# Altium PCB CYCLONE.PcbDoc
Units mil, origin at the board's own origin, x right, y up, seen from the top; angles counter-clockwise.
Board outline 1900 x 1350 mil, 4 copper layers (Top Layer, Mid Layer 1, Mid Layer 2, Bottom Layer), stack 61.811 mil thick; 32 components, 20 nets, 111 pads, 65 vias.
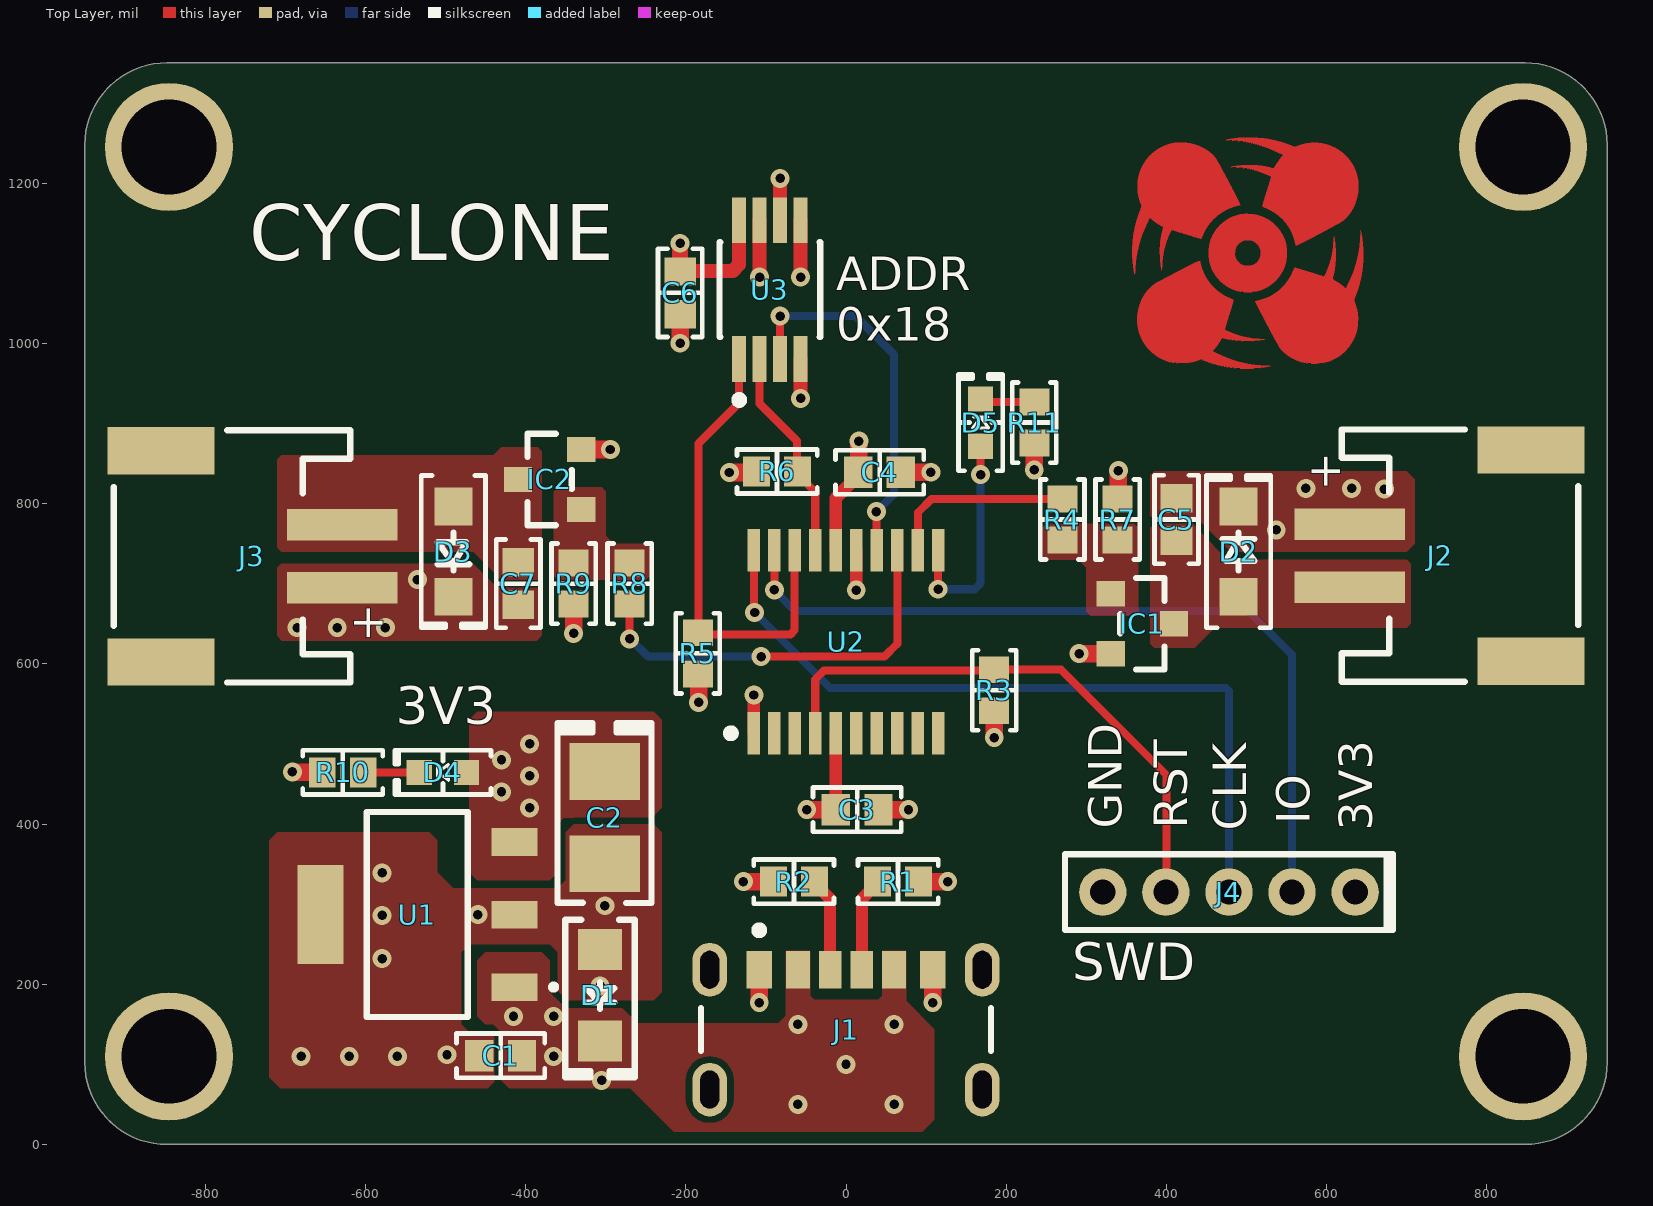
[diagram p0: Top Layer view]
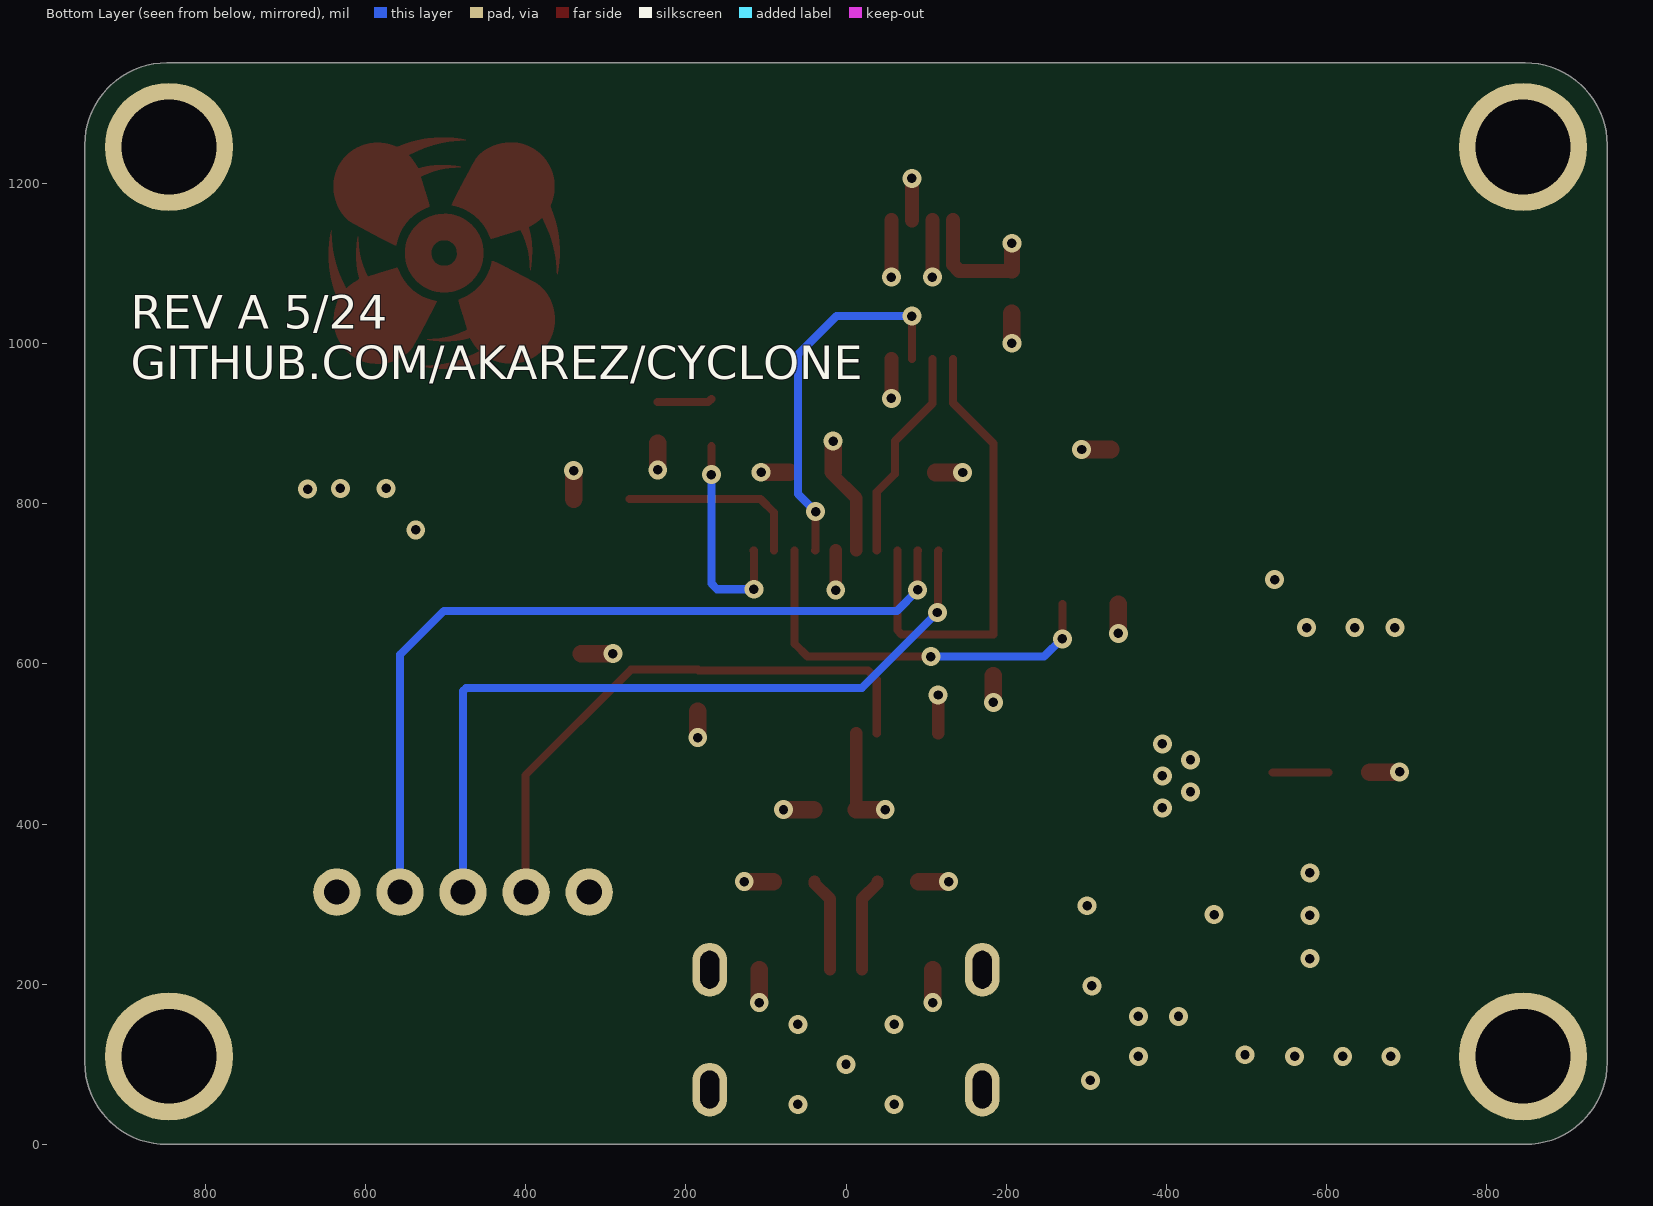
[diagram p1: Bottom Layer view, seen from below]
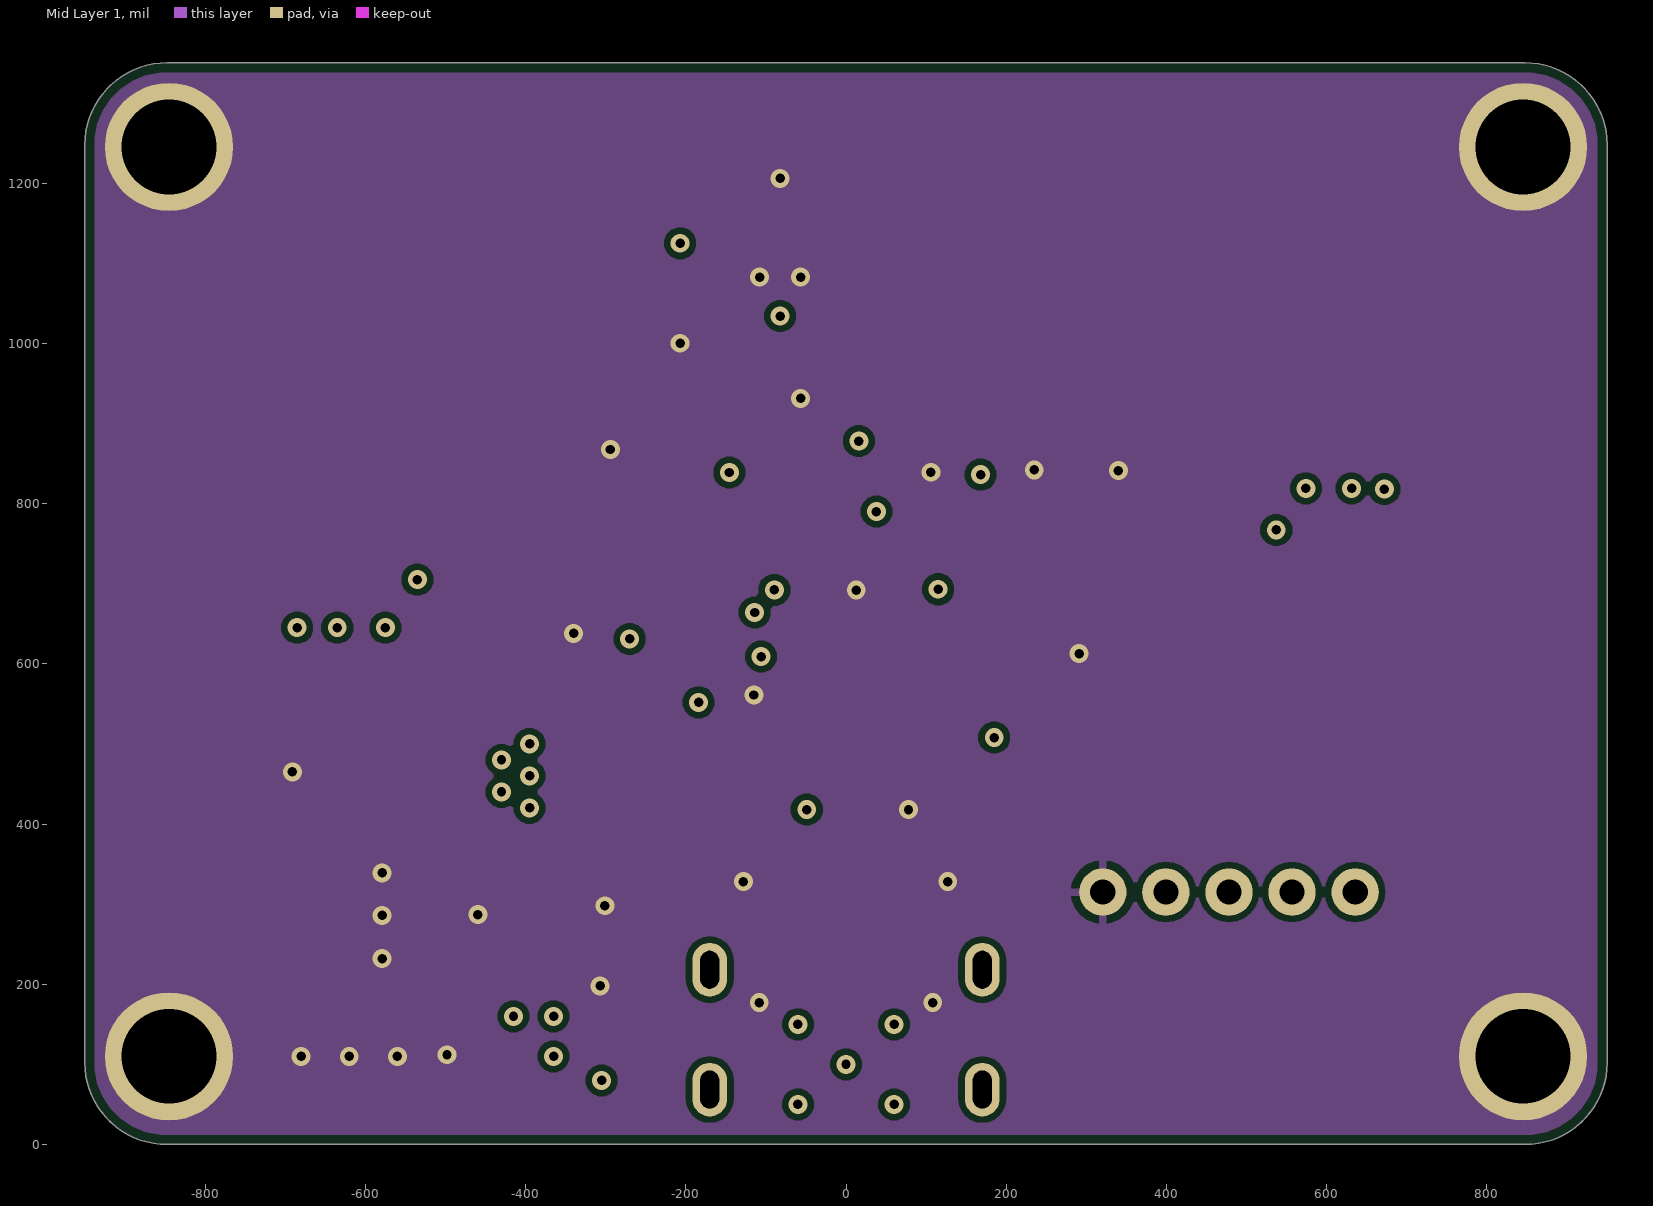
[diagram p2: Mid Layer 1]
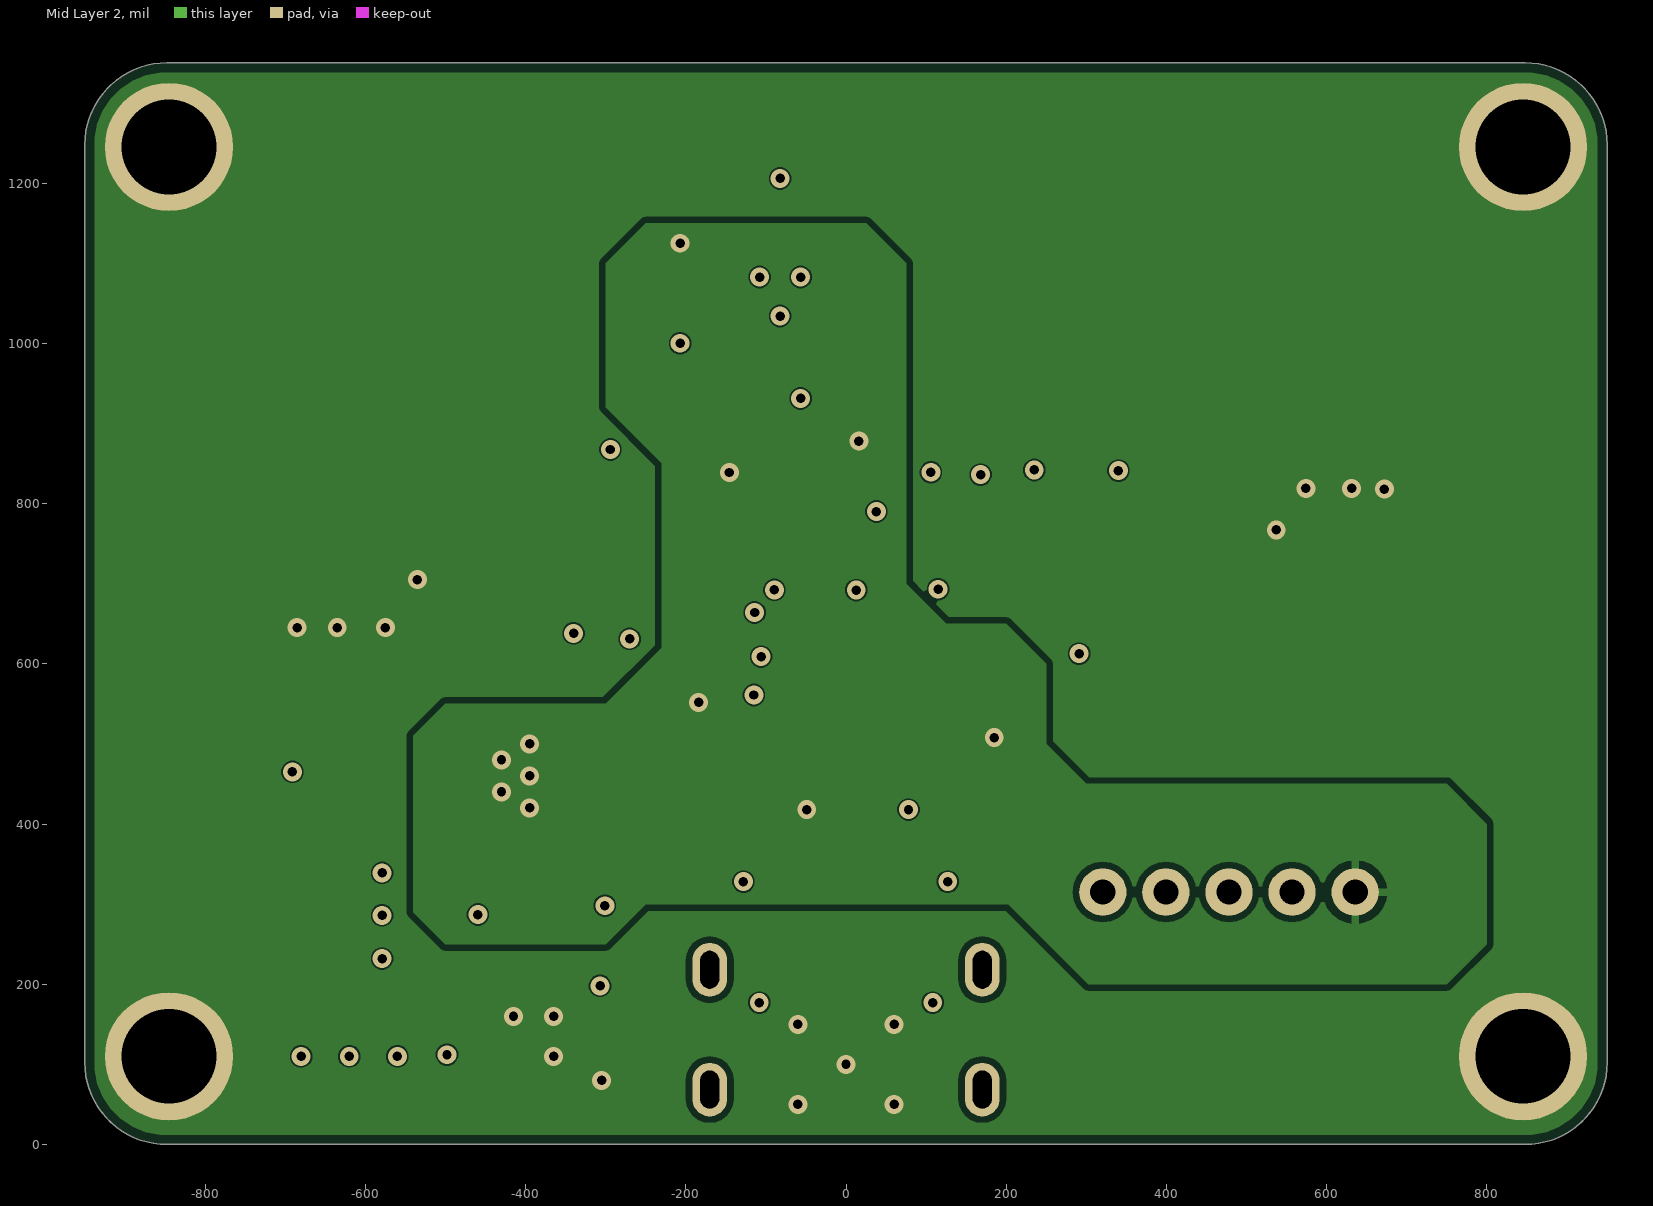
[diagram p3: Mid Layer 2]
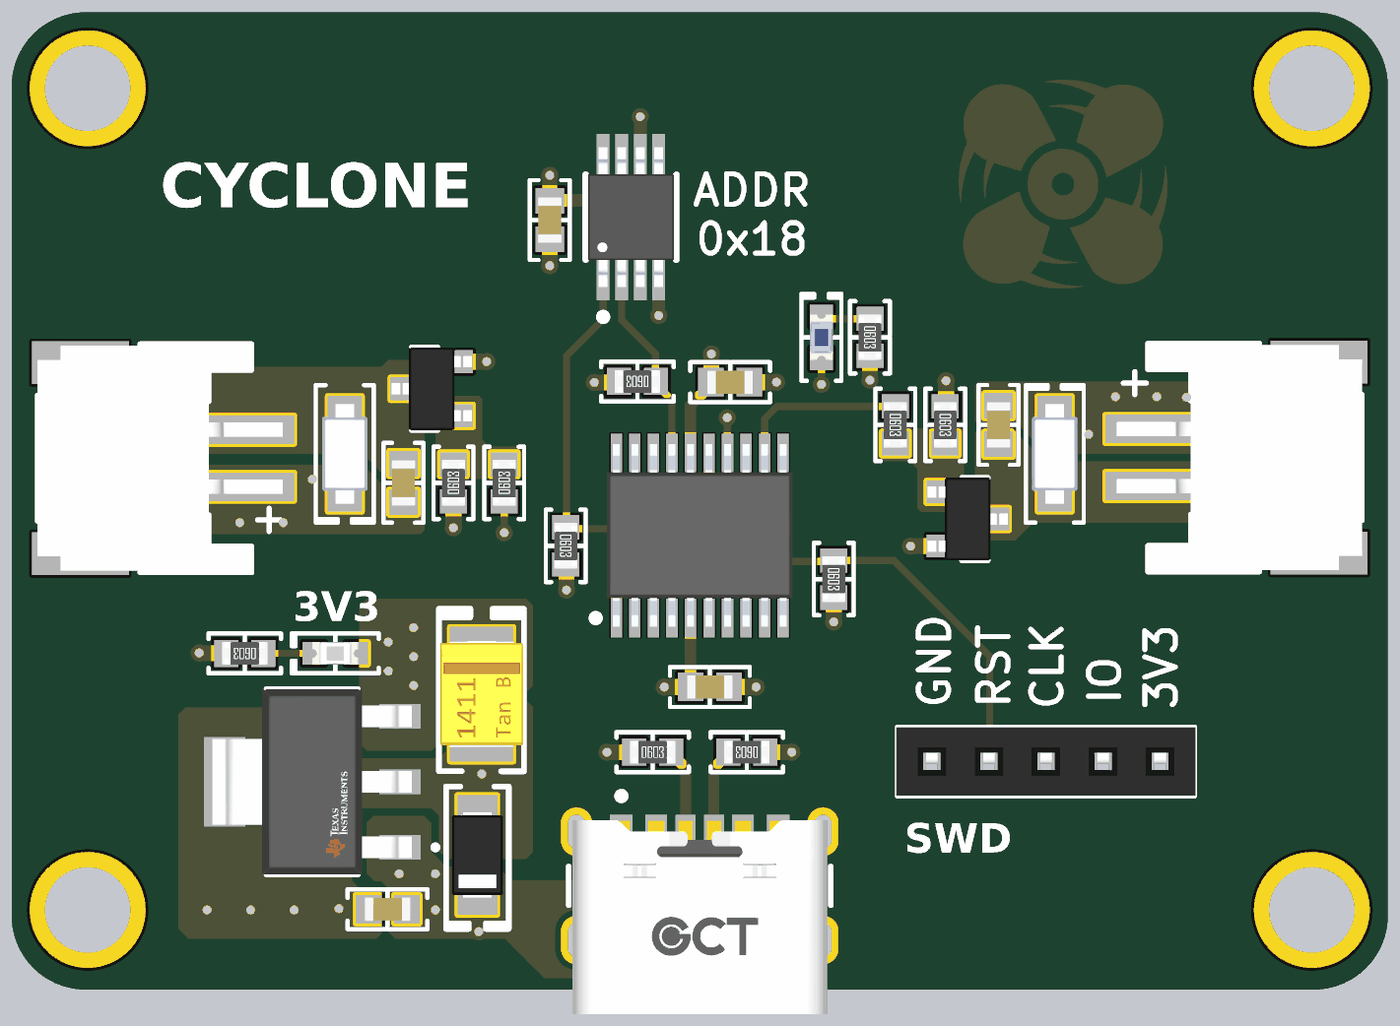
[diagram p4: 3D render of the assembled board from above, using the file's embedded part models]

## Layer stack, top to bottom
Top Solder: solder mask 0.5, Solder Resist, Dk 3.8
Top Layer: signal copper 1.378
Dielectric 1: prepreg 3.937, 2313, Dk 4.05
Mid Layer 1: signal copper 0.689
Core: core 49.8031, FR-4, Dk 4.5
Mid Layer 2: signal copper 0.689
Dielectric 2: prepreg 3.937, 2313, Dk 4.05
Bottom Layer: signal copper 1.378
Bottom Solder: solder mask 0.5, Solder Resist, Dk 3.8

## Board outline
-950,102.43 ccw(c-847.57,102.43) -847.57,0 847.57,0 ccw(c847.57,102.43) 950,102.43 950,1247.57 ccw(c847.57,1247.57) 847.57,1350 -847.57,1350 ccw(c-847.57,1247.57) -950,1247.57

## Design rules (kind name [scope] priority, off if disabled: settings)
BoardOutlineClearance [All] p1: gap=11.81 ignorepadtopadclearanceinfootprint=FALSE except(15.75: Arc-SplitBarrior Arc-SplitContinuation Track-SplitBarrior Track-SplitContinuation SMDPad-SplitBarrior SMDPad-SplitContinuation THPad-SplitBarrior THPad-SplitContinuation Via-SplitBarrior Via-SplitContinuation Fill-SplitBarrior Fill-SplitContinuation Poly-SplitBarrior Poly-SplitContinuation Region-SplitBarrior Region-SplitContinuation Text-SplitBarrior Text-SplitContinuation)
Clearance "Clearance Different Nets" [All] p1: gap=7.87 ignorepadtopadclearanceinfootprint=FALSE except(3.5: Arc-Arc Arc-Track Arc-SMDPad Track-Track Track-SMDPad; 5: SMDPad-SMDPad SMDPad-Via THPad-Via Via-Via; 10: Arc-Text Track-Text SMDPad-Text THPad-Text Via-Text Fill-Text Poly-Text Region-Text Text-Text; 19.68: THPad-THPad Via-Hole)
Clearance "Clearance Same Nets" [All] p2: gap=7.87 ignorepadtopadclearanceinfootprint=FALSE except(3.5: Arc-Arc Arc-Track Arc-SMDPad Track-Track Track-SMDPad SMDPad-SMDPad; 5: SMDPad-Via THPad-Via; 10: Arc-Via Arc-Text Track-Via Track-Text SMDPad-Text THPad-Text Via-Via Via-Text Fill-Text Poly-Text Region-Text Text-Text)
Clearance "Clearance Bottom Layer" [OnLayer('Bottom Layer')] p3: gap=8 ignorepadtopadclearanceinfootprint=TRUE except(10: Arc-Text Track-Text SMDPad-Text THPad-Text Via-Text Fill-Text Poly-Text Region-Text Text-Text)
Clearance "Clearance Top Layer" [OnLayer('Top Layer')] p4: gap=8 ignorepadtopadclearanceinfootprint=TRUE except(10: Arc-Text Track-Text SMDPad-Text THPad-Text Via-Text Fill-Text Poly-Text Region-Text Text-Text)
HoleSize [All] p1: absolutevalues=TRUE maxlimit=248.03 minlimit=7.87 maxpercent=80.000 minpercent=20.000
MinimumAnnularRing [All] p1: minimumring=5.12
MinimumSolderMaskSliver [All] p1: minsoldermaskwidth=3.94
PolygonConnect [All] p1: thpad.connectstyle=Relief thpad.reliefconductorwidth=10 thpad.reliefentries=4 thpad.polygonreliefangle="90 Angle" thpad.airgapwidth=10 smdpad.connectstyle=Direct smdpad.reliefconductorwidth=10 smdpad.reliefentries=4 smdpad.polygonreliefangle="90 Angle" smdpad.airgapwidth=10 via.connectstyle=Direct via.reliefconductorwidth=10 via.reliefentries=4 via.polygonreliefangle="90 Angle" via.airgapwidth=10
PolygonConnect PolygonConnect_1 [InNet('GND')] p2: thpad.connectstyle=Relief thpad.reliefconductorwidth=20 thpad.reliefentries=4 thpad.polygonreliefangle="90 Angle" thpad.airgapwidth=10 smdpad.connectstyle=Relief smdpad.reliefconductorwidth=20 smdpad.reliefentries=4 smdpad.polygonreliefangle="90 Angle" smdpad.airgapwidth=10 via.connectstyle=Direct via.reliefconductorwidth=20 via.reliefentries=4 via.polygonreliefangle="90 Angle" via.airgapwidth=10
RoutingCorners [All] p1: cornerstyle=Round minsetback=100 maxsetback=100
RoutingVias [All] p1: holewidth=19.68 width=39.37 viastyle="Through Hole" minholewidth=7.87 minwidth=13.78 maxholewidth=39.37 maxwidth=78.74
SilkToSilkClearance [All] p1: silktosilkclearance=3.94
SilkToSolderMaskClearance [IsPad] p1: minsilkscreentomaskgap=3.94 clearancetoexposedcopper=TRUE
SolderMaskExpansion [All] p1: expansion=4 istentingtop=FALSE
Width [All] p1: maxlimit=100 minlimit=3.5 preferedwidth=15
25 further rules are at their usual default settings.

## Classes and differential pairs
component class MCU: C3 C4 D5 R3 R11 U2
component class PERIPHERALS: C5 C6 C7 D2 D3 IC1 IC2 J2 J3 J4 R4 R5 R6 R7 R8 R9 U3
component class USB: C1 C2 D1 D4 J1 R1 R2 R10 U1

## Components (designator, comment, footprint, x,y, rotation, side; value= is the part's Value field where it differs from the comment)
C1 "1 µ" "CAP 0603_1608" -431,111 r0 top
C2 "33 µF" "CAP POL 1411_3528" -301,408 r270 top
C3 "0.1 µ" "CAP 0603_1608" 14,418 r180 top
C4 "0.1 µ" "CAP 0603_1608" 42,839 r180 top
C5 "1 µ" "CAP 0603_1608" 412.5,780 r90 top
C6 "0.1 µ" "CAP 0603_1608" -207,1063 r90 top
C7 "1 µ" "CAP 0603_1608" -409,700 r270 top
D1 "VTVS5V0ASMF-M3-08" "SMF DO-219AB" -307,186 r270 top
D2 "US1DWF-7" SOD123F 490,740 r90 top
D3 "US1DWF-7" SOD123F -490,740 r270 top
D4 "Green" "LED 0603_1608 GREEN" -503.11,464.43 r180 top
D5 "Blue" "LED 0603_1608 BLUE" 168,901 r90 top
IC1 "DMN62D0U-13" "DIODES SOT-23-3" 370,650 r0 top
IC2 "DMN62D0U-13" "DIODES SOT-23-3" -370,830 r180 top
J1 "USB4125-GF-A-0190" FP-USB4125-GF-A-0190-MFG 0,100 r0 top
J2 "S2B-PH-SM4-TB(LF)(SN)" "JST S2B-PH-SM4-TB" 796,735 r270 top
J3 "S2B-PH-SM4-TB(LF)(SN)" "JST S2B-PH-SM4-TB" -796,734 r90 top
J4 "NPPN051BFCN-RC" "SULLINS NPPN051BFCN" 478,315 r180 top
R1 "5.1 k" "RES 0603_1608" 65,328 r180 top
R2 "5.1 k" "RES 0603_1608" -65,328 r0 top
R3 "10 k" "RES 0603_1608" 185,567 r270 top
R4 "220" "RES 0603_1608" 270,780 r270 top
R5 "10 k" "RES 0603_1608" -185,613 r270 top
R6 "10 k" "RES 0603_1608" -86,840 r180 top
R7 "10 k" "RES 0603_1608" 339,780 r270 top
R8 "220" "RES 0603_1608" -270,700 r90 top
R9 "10 k" "RES 0603_1608" -340,700 r90 top
R10 "1 k" "RES 0603_1608" -628.11,464.43 r180 top
R11 "1 k" "RES 0603_1608" 235,901 r270 top
U1 "LM3940" FP-DCY0004A-IPC_C -535,287 r180 top
U2 "STM32F030F4P6TR" STM-TSSOP20_M 0,627.37 r90 top
U3 "MCP9808T-E/MS" FP-C04-111-MFG -95,1067 r90 top

## Footprints (in the part's own frame and the unit in brackets; to place one, negate y for a bottom-side part, rotate by r counter-clockwise, add the part's x,y. Pads: shape width x height; smd on the part's side, far side on the other; paste and mask are expansions set on the pad)
"CAP 0603_1608" [mm] "Chip Capacitor, 2-Leads, Body 1.60x0.80mm, IPC Medium Density"
  rect 0.9x1 smd: 1(-0.675,0) 2(0.675,0)
  silkscreen extent -1.4,-0.7 1.4,0.7, body extent -0.8,-0.41 0.8,0.41, height 0.82
"CAP POL 1411_3528" [mm] "Molded Capacitor, 2-Leads, Body 3.50x2.80mm, IPC Medium Density"
  rect 1.8x2.23 smd: 1(-1.46,0) 2(1.46,0)
  silkscreen extent -3,-1.5 2.71,1.48, body extent -1.87,-1.45 1.86,1.45, height 2
"DIODES SOT-23-3" [mm] "SOT23, 3-Leads, Body 2.90x2.40mm, Pitch 0.95mm, IPC Medium Density"
  rect 0.9x0.8 smd: 1(-1,0.95) 2(-1,-0.95) 3(1,0)
  silkscreen extent -0.7,-1.45 0.7,1.45, body extent -1.41,-1.45 1.41,1.45, height 1.5
FP-C04-111-MFG [mm]
  rect 1.45x0.45 smd paste+0 mask+0: 1(-2.2,0.975) 2(-2.2,0.325) 3(-2.2,-0.325) 4(-2.2,-0.975) 5(2.2,-0.975) 6(2.2,-0.325) 7(2.2,0.325) 8(2.2,0.975)
  silkscreen extent -3.62,-1.6 1.5,1.6, body extent -2.45,-1.5 2.45,1.5, height 1.1
FP-DCY0004A-IPC_C [mm]
  rect 1.454x0.873 smd paste+0 mask+0: 1(-3.075,2.3) 2(-3.075,0) 3(-3.075,-2.3)
  rect 1.454x3.132 smd paste+0 mask+0: 4(3.075,0)
  silkscreen extent -4.37,-3.25 1.6,3.25, body extent -3.9,-3.35 3.9,3.35, height 0.25
FP-USB4125-GF-A-0190-MFG [mm]
  rrect100% 1.1x1.7 hole 1.2 slot 0.6 at 0 deg paste-2539.97 mask+0: 1(-4.32,3) 2(4.32,3) 3(-4.32,-0.8) 4(4.32,-0.8)
  rect 0.7x1.2 smd paste+0 mask+0: A5(-0.5,3) B5(0.5,3)
  rect 0.76x1.2 smd paste+0 mask+0: A9(1.52,3) B9(-1.52,3)
  rect 0.8x1.2 smd paste+0 mask+0: A12(2.75,3) B12(-2.75,3)
  silkscreen extent -4.59,0.43 4.59,4.37, body extent -4.97,-3.57 4.97,3.95, height 0.25
"JST S2B-PH-SM4-TB" [mm] "JST PH Series 2mm pitch, side entry connector"
  rect 1x3.5 smd: 1(-1,-4.25) 2(1,-4.25)
  rect 1.5x3.4 smd: M(-3.35,1.5) M(3.35,1.5)
  silkscreen extent -4,-4.5 4,3, body extent -3.95,-5.6 3.95,3.01, height 5.6
"LED 0603_1608 BLUE" [mm] "Chip Diode, 2-Leads, Body 1.60x0.80mm, IPC Medium Density"
  rect 0.8x0.8 smd: 1(-0.75,0) 2(0.75,0)
  silkscreen extent -1.52,-0.7 1.52,0.7, body extent -0.8,-0.4 0.8,0.4, height 0.53
"LED 0603_1608 GREEN" [mm] "Chip Diode, 2-Leads, Body 1.60x0.80mm, IPC Medium Density"
  rect 0.8x0.8 smd: 1(-0.75,0) 2(0.75,0)
  silkscreen extent -1.52,-0.7 1.52,0.7, body extent -0.8,-0.4 0.8,0.4, height 0.53
"RES 0603_1608" [mm] "Chip Resistor, 2-Leads, Body 1.60x0.80mm, IPC Medium Density"
  rect 0.85x0.95 smd: 1(-0.65,0) 2(0.65,0)
  silkscreen extent -1.27,-0.7 1.27,0.7, body extent -0.8,-0.4 0.8,0.4, height 0.45
"SMF DO-219AB" [mm] "Molded Diode, 2-Leads, Body 3.90x1.90mm, IPC Medium Density"
  rect 1.3x1.4 smd: 1(-1.45,0) 2(1.45,0)
  silkscreen extent -2.4,-1.1 2.59,1.1, body extent -1.5,-0.9 1.5,0.9, height 1.18
SOD123F [mm] "SODFL, 2-Leads, Body 1.60x3.50mm, IPC Medium Density"
  rect 1.2x1.2 smd: 1(-1.43,0) 2(1.43,0)
  silkscreen extent -2.41,-1.02 2.41,1.02, body extent -1.75,-0.8 1.75,0.8, height 1.1
STM-TSSOP20_M [mm] "SOP, 20-Leads, Body 6.6x4.5mm, Pitch 0.65mm, IPC Low Density"
  rect 1.35x0.4 smd mask+0.051: 1(-2.9,2.925) 2(-2.9,2.275) 3(-2.9,1.625) 4(-2.9,0.975) 5(-2.9,0.325) 6(-2.9,-0.325) 7(-2.9,-0.975) 8(-2.9,-1.625) 9(-2.9,-2.275) 10(-2.9,-2.925) 11(2.9,-2.925) 12(2.9,-2.275) 13(2.9,-1.625) 14(2.9,-0.975) 15(2.9,-0.325) 16(2.9,0.325) 17(2.9,0.975) 18(2.9,1.625) 19(2.9,2.275) 20(2.9,2.925)
  silkscreen extent -3.02,3.52 -2.78,3.77, body extent -3.2,-3.25 3.2,3.25, height 1.2
"SULLINS NPPN051BFCN" [mm]
  round 1.5 hole 0.8: 1(-4,0) 2(-2,0) 3(0,0) 4(2,0) 5(4,0)
  silkscreen extent -5.2,-1.2 5.2,1.2, body extent -5.25,-1.2 5.25,1.2, height 4.41

## Part data
C1 C5 C7: library part C0603C105K4RACAUTO, "CAP CER 1UF 16V X7R 0603", Capacitance="1 µF", Device Package="0603 (1608 Metric)", Manufacturer=KEMET, Operating Temperature="-55°C ~ 125°C", Ratings=AEC-Q200, Supplier Part Number 1=399-17704-1-ND, Temperature Coefficient=X7R, Tolerance=±10%, Voltage - Rated=16V, Applications="Automotive, Bypass, Decoupling", ComponentLink1Description=Datasheet, ComponentLink1URL=https://api.kemet.com/component-edge/download/datasheet/C0603C105K4RACAUTO.pdf, ComponentLink2Description="DigiKey Link", ComponentLink2URL=https://www.digikey.com/en/products/detail/kemet/C0603C105K4RACAUTO/8635831, lastupdated="2/9/2024 8:10:30 PM", Lifecycle Status=Active, Minimum Order=1, Mounting Type="Surface Mount, MLCC", Package / Case="0603 (1608 Metric)", Packaging=TapeAndReel, Part Number=C0603C105K4RACAUTO, Part Status=Active, partid=2179, Price=0.01, Series="SMD Auto X7R", Size / Dimension="0.063\" L x 0.031\" W (1.60mm x 0.80mm)", Supplier 1=DigiKey, Thickness (Max)="0.037\" (0.95mm)"
C2: library part T495B336M016ATE350, "CAP TANT 33UF 20% 16V 1411", Device Package="1411 (3528 Metric)", ESR (Equivalent Series Resistance)="350mOhm @ 100kHz", Lifetime @ Temp.="2000 Hrs @ 125°C", Manufacturer=KEMET, Manufacturer Size Code=B, Operating Temperature="-55°C ~ 125°C", Supplier Part Number 1=399-18820-1-ND, Tolerance=±20%, Voltage - Rated="16 V", Capacitance="33 µF", ComponentLink1Description=Datasheet, ComponentLink1URL=https://api.kemet.com/component-edge/download/datasheet/T495B336M016ATE350.pdf, ComponentLink2Description="DigiKey Link", ComponentLink2URL=https://www.digikey.com/en/products/detail/kemet/T495B336M016ATE350/9642234, Features="General Purpose", Height - Seated (Max)="0.083\" (2.10mm)", lastupdated="3/11/2024 7:26:10 AM", Lifecycle Status=Active, Minimum Order=1, Mounting Type="Surface Mount", Package / Case="1411 (3528 Metric)", Packaging=TapeAndReel, Part Number=T495B336M016ATE350, Part Status=Active, partid=33, Price=0.64, Series=T495, Size / Dimension="0.138\" L x 0.110\" W (3.50mm x 2.80mm)", Supplier 1=DigiKey, Type=Molded
C3 C4 C6: library part C0603C104K5RAC7411, "CAP CER 0.1UF 50V X7R 0603", Capacitance="0.1 µF", Device Package="0603 (1608 Metric)", Manufacturer=KEMET, Operating Temperature="-55°C ~ 125°C", Supplier Part Number 1=399-C0603C104K5RAC7411CT-ND, Temperature Coefficient=X7R, Tolerance=±10%, Voltage - Rated=50V, Applications="Bypass, Decoupling", ComponentLink1Description=Datasheet, ComponentLink1URL=https://api.kemet.com/component-edge/download/datasheet/C0603C104K5RAC7411.pdf, ComponentLink2Description="DigiKey Link", ComponentLink2URL=https://www.digikey.com/en/products/detail/kemet/C0603C104K5RAC7411/3317013, lastupdated="2/9/2024 8:10:30 PM", Lifecycle Status=Active, Minimum Order=1, Mounting Type="Surface Mount, MLCC", Package / Case="0603 (1608 Metric)", Packaging=TapeAndReel, Part Number=C0603C104K5RAC7411, Part Status=Active, partid=2233, Price=0.01, Series="SMD Comm X7R", Size / Dimension="0.063\" L x 0.031\" W (1.60mm x 0.80mm)", Supplier 1=DigiKey, Thickness (Max)="0.035\" (0.90mm)"
D1: "TVS DIODE 5V 8.9V DO219AB", Capacitance @ Frequency="2095pF @ 1MHz", Current - Peak Pulse (10/1000µs)=42.95A, Manufacturer="Vishay Semiconductor Diodes Division", Operating Temperature="-55°C ~ 175°C (TJ)", Package / Case=DO-219AB, Power - Peak Pulse=400W, Power Line Protection=No, Supplier Device Package="DO-219AB (SMF)", Supplier Part Number 1=VTVS5V0ASMF-M3-08GICT-ND, Voltage - Breakdown (Min)=6.4V, Voltage - Clamping (Max) @ Ipp=8.9V, Voltage - Reverse Standoff (Typ)=5V, Applications="General Purpose", ComponentLink1Description=Datasheet, ComponentLink1URL=http://www.vishay.com/docs/85891/vtvs3v3asmf.pdf, ComponentLink2Description="DigiKey Link", ComponentLink2URL=http://digikey.com/product-detail/en/vishay-semiconductor-diodes-division/VTVS5V0ASMF-M3-08/VTVS5V0ASMF-M3-08GICT-ND/7056003, lastupdated="3/11/2024 8:09:28 AM", Lifecycle Status=Active, Minimum Order=1, Mounting Type="Surface Mount", Packaging=TapeAndReel, Part Number=VTVS5V0ASMF-M3-08, Part Status=Active, partid=5492, Price=0.11, Series=TransZorb®, Supplier 1=DigiKey, Type=Zener, Unidirectional Channels=1
D2 D3: "DIODE GEN PURP 200V 1A SOD123F", Capacitance @ Vr, F="14pF @ 4V, 1MHz", Current - Average Rectified (Io)=1A, Current - Reverse Leakage @ Vr="5 µA @ 200 V", Manufacturer="Diodes Incorporated", Operating Temperature - Junction="-55°C ~ 150°C", Package / Case=SOD-123F, Supplier Part Number 1=US1DWF-7DICT-ND, Voltage - DC Reverse (Vr) (Max)="200 V", Voltage - Forward (Vf) (Max) @ If="950 mV @ 1 A", ComponentLink1Description=Datasheet, ComponentLink1URL=https://www.diodes.com/assets/Datasheets/US1DWF.pdf, ComponentLink2Description="DigiKey Link", ComponentLink2URL=https://www.digikey.com/en/products/detail/diodes-incorporated/US1DWF-7/7422876, Diode Type=Standard, lastupdated="3/11/2024 7:46:45 AM", Lifecycle Status=Active, Minimum Order=1, Mounting Type="Surface Mount", Packaging=TapeAndReel, Part Number=US1DWF-7, Part Status=Active, partid=1114, Price=0.10, Reverse Recovery Time (trr)="35 ns", Series=-, Speed="Fast Recovery =< 500ns, > 200mA (Io)", Supplier 1=DigiKey, Supplier Device Package=SOD-123F
D4: library part SML-LXFP0603SUGCTR, "LED GREEN CLEAR SMD", Current - Test=5mA, Device Package="0603 (1608 Metric)", Lens Color=Colorless, Manufacturer="Lumex Opto/Components Inc.", Millicandela Rating=13mcd, Supplier Device Package=SMD, Supplier Part Number 1=67-2222-1-ND, Voltage - Forward (Vf) (Typ)=2V, Color=Green, ComponentLink1Description=Datasheet, ComponentLink1URL=https://www.lumex.com/content/files/ProductAttachment/SML-LXFP0603SUGCTR.pdf, ComponentLink2Description="DigiKey Link", ComponentLink2URL=https://www.digikey.com/en/products/detail/lumex-opto-components-inc/SML-LXFP0603SUGCTR/4496766, Configuration=Standard, Height (Max)=0.20mm, lastupdated="3/11/2024 7:51:11 AM", Lens Size="1.60mm x 0.80mm", Lens Style="Rectangle with Flat Top", Lens Transparency=Clear, Lifecycle Status=Active, Minimum Order=1, Mounting Type="Surface Mount", Package / Case="0603 (1608 Metric)", Packaging=TapeAndReel, Part Number=SML-LXFP0603SUGCTR, Part Status=Active, partid=589, Price=0.07, Series=-, Size / Dimension="1.60mm L x 0.80mm W", Supplier 1=DigiKey, Viewing Angle=130°, Wavelength - Peak=574nm
D5: library part LTST-C190TBKT, "LED BLUE CLEAR CHIP SMD", Current - Test=20mA, Device Package="0603 (1608 Metric)", Lens Color=Colorless, Manufacturer="Lite-On Inc.", Millicandela Rating=104mcd, Supplier Device Package="Chip LED", Supplier Part Number 1=160-1646-1-ND, Voltage - Forward (Vf) (Typ)=3.3V, Color=Blue, ComponentLink1Description=Datasheet, ComponentLink1URL=http://optoelectronics.liteon.com/upload/download/DS-22-99-0224/LTST-C190TBKT.PDF, ComponentLink2Description="DigiKey Link", ComponentLink2URL=http://digikey.com/product-detail/en/lite-on-inc/LTST-C190TBKT/160-1646-1-ND/573586, Configuration=Standard, Height (Max)=0.90mm, lastupdated="3/11/2024 7:50:10 AM", Lens Size="1.10mm x 0.80mm", Lens Style="Rectangle with Flat Top", Lens Transparency=Clear, Lifecycle Status=Active, Minimum Order=1, Mounting Type="Surface Mount", Package / Case="0603 (1608 Metric)", Packaging=TapeAndReel, Part Number=LTST-C190TBKT, Part Status=Active, partid=831, Price=0.08, Series=-, Size / Dimension="1.60mm L x 0.80mm W", Supplier 1=DigiKey, Viewing Angle=130°, Wavelength - Dominant=470nm, Wavelength - Peak=468nm
IC1 IC2: "MOSFET N-CH 60V 380MA SOT23", Current - Continuous Drain (Id) @ 25°C="380mA (Ta)", Drain to Source Voltage (Vdss)="60 V", Drive Voltage (Max Rds On,  Min Rds On)="1.8V, 4.5V", Input Capacitance (Ciss) (Max) @ Vds="32 pF @ 30 V", Manufacturer="Diodes Incorporated", Operating Temperature="-55°C ~ 150°C (TJ)", Package / Case="TO-236-3, SC-59, SOT-23-3", Power Dissipation (Max)="380mW (Ta)", Supplier Device Package=SOT-23-3, Supplier Part Number 1=DMN62D0U-13DICT-ND, ComponentLink1Description=Datasheet, ComponentLink1URL=https://www.diodes.com/assets/Datasheets/DMN62D0U.pdf, ComponentLink2Description="DigiKey Link", ComponentLink2URL=https://www.digikey.com/en/products/detail/diodes-incorporated/DMN62D0U-13/5453123, FET Type=N-Channel, Gate Charge (Qg) (Max) @ Vgs="0.5 nC @ 4.5 V", lastupdated="3/11/2024 8:04:06 AM", Lifecycle Status=Active, Minimum Order=1, Mounting Type="Surface Mount", Packaging=TapeAndReel, Part Number=DMN62D0U-13, Part Status=Active, Price=0.03, Rds On (Max) @ Id, Vgs="2Ohm @ 100mA, 4.5V", Series=-, Supplier 1=DigiKey, Technology="MOSFET (Metal Oxide)", Vgs (Max)=±20V, Vgs(th) (Max) @ Id="1V @ 250µA"
J1: library part CMP-002-00081-2, "USB-C (USB TYPE-C) Receptacle Connector 24 (6+18 Dummy) Position Surface Mount, Right Angle; Through Hole", Manufacturer Part #=USB4125-GF-A, Max Current Rating=3A, Max Operating Temperature=85°C, Min Operating Temperature=-30°C, Voltage Rating=20V, Connector Type="USB-C (USB TYPE-C)", Gender=Receptacle, Mounting Technology="Surface Mount, Right Angle; Through Hole", Pins="24 (6+18 Dummy)"
J2 J3: "CONN HEADER SMD R/A 2POS 2MM", Current Rating (Amps)=2A, Insulation Color=Natural, Manufacturer="JST Sales America Inc.", Material Flammability Rating="UL94 V-0", Operating Temperature="-25°C ~ 85°C", Supplier Part Number 1=455-1749-1-ND, Voltage Rating=100V, ComponentLink1Description=Datasheet, ComponentLink1URL=http://www.jst-mfg.com/product/pdf/eng/ePH.pdf, ComponentLink2Description="DigiKey Link", ComponentLink2URL=http://digikey.com/product-detail/en/jst-sales-america-inc/S2B-PH-SM4-TB-LF-SN/455-1749-1-ND/926846, Connector Type=Header, Contact Finish - Mating=Tin, Contact Finish - Post=Tin, Contact Length - Mating="0.130\" (3.30mm)", Contact Material="Copper Alloy", Contact Shape=Square, Contact Type="Male Pin", Fastening Type="Detent Lock", Features="Solder Retention", Insulation Height="0.217\" (5.51mm)", Insulation Material="Polyamide (PA6T), Nylon 6T", lastupdated="1/15/2020 3:45:11 AM", Lifecycle Status=Active, Minimum Order=1, Mounting Type="Surface Mount, Right Angle", Number of Positions=2, Number of Positions Loaded=All, Number of Rows=1, Packaging=TapeAndReel, Part Number=S2B-PH-SM4-TB(LF)(SN), Part Status=Active, partid=115, Pitch - Mating="0.079\" (2.00mm)", Price=0.27, Series=PH, Shrouding="Shrouded - 4 Wall", Style="Board to Cable/Wire", Supplier 1=DigiKey, Termination=Solder
J4: "CONN HDR 5POS 0.079 GOLD PCB", Current Rating (Amps)=2A, Insulation Color=Black, Manufacturer="Sullins Connector Solutions", Material Flammability Rating="UL94 V-0", Operating Temperature="-40°C ~ 105°C", Supplier Part Number 1=S5751-05-ND, ComponentLink1Description=Datasheet, ComponentLink1URL=https://drawings-pdf.s3.amazonaws.com/10483.pdf, ComponentLink2Description="DigiKey Link", ComponentLink2URL=https://www.digikey.com/en/products/detail/sullins-connector-solutions/NPPN051BFCN-RC/804807, Connector Type=Header, Contact Finish - Mating=Gold, Contact Finish - Post=Gold, Contact Finish Thickness - Mating=Flash, Contact Length - Post="0.094\" (2.40mm)", Contact Type="Female Socket", Fastening Type=Push-Pull, Insulation Height="0.173\" (4.40mm)", lastupdated="6/21/2022 2:43:08 PM", Lifecycle Status=Active, Minimum Order=1, Mounting Type="Through Hole", Number of Positions=5, Number of Positions Loaded=All, Number of Rows=1, Packaging=Tube, Part Number=NPPN051BFCN-RC, Part Status=Active, Pitch - Mating="0.079\" (2.00mm)", Price=0.35, Series=-, Style="Board to Board", Supplier 1=DigiKey, Termination=Solder
R1 R2: library part RMCF0603JG5K10, "RES 5.1K OHM 5% 1/10W 0603", Device Package="0603 (1608 Metric)", Manufacturer="Stackpole Electronics Inc", Operating Temperature="-55°C ~ 155°C", Power (Watts)="0.1W, 1/10W", Ratings=AEC-Q200, Resistance="5.1 kOhms", Supplier Device Package=0603, Supplier Part Number 1=738-RMCF0603JG5K10CT-ND, Temperature Coefficient=±200ppm/°C, Tolerance=±5%, ComponentLink1Description=Datasheet, ComponentLink1URL=https://www.seielect.com/catalog/sei-packaging.pdf, ComponentLink2Description="DigiKey Link", ComponentLink2URL=https://www.digikey.com/en/products/detail/stackpole-electronics-inc/RMCF0603JG5K10/1712287, Composition="Thick Film", Features="Automotive AEC-Q200", Height - Seated (Max)="0.022\" (0.55mm)", lastupdated="2/9/2024 8:43:35 PM", Lifecycle Status=Active, Minimum Order=1, Number of Terminations=2, Package / Case="0603 (1608 Metric)", Packaging=CutTape, Part Number=RMCF0603JG5K10, Part Status=Active, partid=5180, Price=0.01, Series=RMCF, Size / Dimension="0.061\" L x 0.031\" W (1.55mm x 0.80mm)", Supplier 1=DigiKey
R3 R5 R6 R7 R9: library part RNCS0603BKE10K0, "RES 10K OHM 0.1% 1/16W 0603", Device Package="0603 (1608 Metric)", Manufacturer="Stackpole Electronics Inc", Operating Temperature="-55°C ~ 155°C", Power (Watts)="0.063W, 1/16W", Ratings=AEC-Q200, Resistance="10 kOhms", Supplier Device Package=0603, Supplier Part Number 1=RNCS0603BKE10K0CT-ND, Temperature Coefficient=±25ppm/°C, Tolerance=±0.1%, ComponentLink1Description=Datasheet, ComponentLink1URL=https://www.seielect.com/catalog/sei-rncs_rnch.pdf, ComponentLink2Description="DigiKey Link", ComponentLink2URL=https://www.digikey.com/en/products/detail/stackpole-electronics-inc/RNCS0603BKE10K0/1708836, Composition="Thin Film", Features="Anti-Corrosive, Automotive AEC-Q200, Moisture Resistant", Height - Seated (Max)="0.022\" (0.55mm)", lastupdated="2/9/2024 8:43:37 PM", Lifecycle Status=Active, Minimum Order=1, Number of Terminations=2, Package / Case="0603 (1608 Metric)", Packaging=TapeAndReel, Part Number=RNCS0603BKE10K0, Part Status=Active, partid=4838, Price=0.06, Series=RNCS, Size / Dimension="0.061\" L x 0.031\" W (1.55mm x 0.80mm)", Supplier 1=DigiKey
R4 R8: library part ERA-3AED221V, "RES SMD 220 OHM 0.5% 1/10W 0603", Device Package="0603 (1608 Metric)", Manufacturer="Panasonic Electronic Components", Operating Temperature="-55°C ~ 155°C", Power (Watts)="0.1W, 1/10W", Ratings=AEC-Q200, Resistance="220 Ohms", Supplier Device Package=0603, Supplier Part Number 1=P123752CT-ND, Temperature Coefficient=±25ppm/°C, Tolerance=±0.5%, ComponentLink1Description=Datasheet, ComponentLink1URL=https://industrial.panasonic.com/cdbs/www-data/pdf/RDM0000/AOA0000C307.pdf, ComponentLink2Description="DigiKey Link", ComponentLink2URL=https://www.digikey.com/en/products/detail/panasonic-electronic-components/ERA-3AED221V/9373509, Composition="Thin Film", Features="Automotive AEC-Q200", Height - Seated (Max)="0.022\" (0.55mm)", lastupdated="2/9/2024 8:43:36 PM", Lifecycle Status=Active, Minimum Order=1, Number of Terminations=2, Package / Case="0603 (1608 Metric)", Packaging=TapeAndReel, Part Number=ERA-3AED221V, Part Status=Active, partid=4952, Price=0.03, Series=ERA-3A, Size / Dimension="0.063\" L x 0.031\" W (1.60mm x 0.80mm)", Supplier 1=DigiKey
R10 R11: library part CPF0603B1K0E, "RES SMD 1K OHM 0.1% 1/16W 0603", Device Package="0603 (1608 Metric)", Manufacturer="TE Connectivity Passive Product", Operating Temperature="-55°C ~ 155°C", Power (Watts)="0.063W, 1/16W", Resistance="1 kOhms", Supplier Device Package=0603, Supplier Part Number 1=A119887CT-ND, Temperature Coefficient=±25ppm/°C, Tolerance=±0.1%, ComponentLink1Description=Datasheet, ComponentLink1URL=https://www.te.com/commerce/DocumentDelivery/DDEController?Action=srchrtrv&DocNm=1773200&DocType=DS&DocLang=English, ComponentLink2Description="DigiKey Link", ComponentLink2URL=https://www.digikey.com/en/products/detail/te-connectivity-passive-product/CPF0603B1K0E/2390473, Composition="Thin Film", Height - Seated (Max)="0.022\" (0.55mm)", lastupdated="2/9/2024 8:43:37 PM", Lifecycle Status=Active, Minimum Order=1, Number of Terminations=2, Package / Case="0603 (1608 Metric)", Packaging=TapeAndReel, Part Number=CPF0603B1K0E, Part Status=Active, partid=4877, Price=0.09, Series="CPF, Neohm", Size / Dimension="0.061\" L x 0.031\" W (1.55mm x 0.80mm)", Supplier 1=DigiKey
U1: library part CMP-019-00049-4, "IC REG LDO 3.3V 1A SOT223"
U2: library part CMP-031-00009-3, "RISC Microcontroller, 32-Bit, FLASH, CORTEX-M0 CPU, 48MHz, CMOS, PDSO20", Case/Package=TSSOP, Max Operating Temperature=85°C, Max Supply Voltage=3.6V, Min Operating Temperature=-40°C, Min Supply Voltage=2.4V, Pins=20, RoHS Compliant=Yes
U3: library part CMP-010-00026-1, "Serial Switch/Digital Sensor, 16 Bit(s), 1Cel, Square, Surface Mount", Max Operating Temperature=125°C, Max Supply Voltage=5.5V, Min Operating Temperature=-40°C, Min Supply Voltage=2.7V, Mounting Technology="Surface Mount", RoHS Compliant=Yes, Sensor Type="TEMPERATURE SENSOR,SWITCH/DIGITAL OUTPUT,SERIAL"

## Free pads (board coordinates)
  round 160 hole 118.11: MH(-845,110) MH(-845,1245) MH(845,110) MH(845,1245)

## Via types
v1: diameter 23.62, hole 11.81, Top Layer to Bottom Layer, tented both sides, 65 vias

## Nets (pads, with @x,y where several pads share a name; then routed paths per layer and width w, separated by ;. In a path a pad name is that pad's centre, name@x,y a point inside that pad or via, vN(x,y) a via of type N, cw(c..) or ccw(c..) an arc to the next point about the centre after c; other vN are vias at no path point)
+3V3: C2.1 C3.2 C4.2 C6.2 D4.1 J4.1 R3.2 R5.2 R6.2 U1.3 U2.5 U2.16 U3.8 | length 541.4
  Top Layer w15.75: U2.5 U2.5@-12.68,513.09 ; U2.16 -12.8,806.81 C4.2@17.43,837.03 ; C3.2@-12.68,418.11 U2.5@-12.68,508.79 ; R3.2@184.5,540.91 R3.2
  Top Layer w17.72: C6.2@-206.7,1090.57 -207,1090.28 -141.28,1090.28 -133.39,1098.17 U3.8
  Top Layer w20: v1(-207,1124.8) -207,1090.87 C6.2@-206.7,1090.57 ; C3.2@-12.8,418 C3.2@-12.68,418.11 ; R3.2@184.5,540.91 R3.2@185,540.41
  Top Layer w22: v1(-184,551.87) R5.2@-184,585 ; v1(-145.58,838.7) R6.2@-112.04,838.7 ; v1(-49,418) C3.2@-12.8,418 ; C4.2@16,839.57 v1(16,878) ; v1(185,507.87) R3.2@185,540.41
  other v1: -395,420 -430,440 -395,460 -430,480 -395,500
+VBUS: C1.2 C5.2 C7.2 D1.2 D2.2 D3.2 J1.A9 J1.B9 J2.1 J3.1 U1.1
  other v1: -60,50 60,50 -305,80 0,100 -365,110 -60,150 60,150 -415,160 -365,160 -685,645 -635,645 -575,645 -535,705 537,767 672,818 574,819 631,819
ALERT: U2.14 U3.3 | length 469.3
  Top Layer w10: U3.3 -82.1,980.49 -82.1,1033.9 v1@-82,1034 ; v1(38,790) 38.19,789.81 38.19,741.74 U2.14
  Bottom Layer w10: v1@-82,1034 12,1034 60,986 60,812 v1(38,790)
  other v1: -82.2,1034
FAN_1: R4.1 U2.12 | length 234.5
  Top Layer w10: U2.12 89.57,788.57 106.59,805.59 R4.1
FAN_2: R8.1 U2.13 | length 509.7
  Top Layer w10: v1(-270,631) R8.1 ; v1(-106,609) 48,609 63.98,624.98 U2.13
  Bottom Layer w10: v1(-270,631) -269.23,631 -247.23,609 v1(-106,609)
GND: C1.1 C2.2 C3.1 C4.1 C6.1 D1.1 IC1.2 IC2.2 J1.A12 J1.B12 J4.5 R1.1 R2.1 R7.1 R9.1 R10.2 R11.2 U1.2 U1.4 U2.1 U2.15 U3.4 U3.5 U3.6 U3.7 | length 824.3
  Top Layer w15.75: U2.1 -115.08,513.28 -115.08,560.92 v1(-115,561) ; v1@12.8,693.8 U2.15
  Top Layer w17.72: v1(-691,465) v1@-690.71,464.71 ; R10.2@-653.99,464.71 R10.2 ; v1(-107.8,1082.68) -107.8,1109.67 U3.7 ; U3.6 v1(-82.2,1205.71) ; U3.4 -56.61,931.61 v1@-56.1,931.1 ; v1(-56.61,1082.68) U3.5
  Top Layer w22: v1@-690.71,464.71 R10.2@-653.99,464.71 ; v1(-340,638) R9.1 ; IC2.2 v1(-294,867.4) ; v1(-207,1000) C6.1@-207,1037.13 ; v1(-128,328) R2.1 ; v1(-108.27,177) J1.B12 ; C3.1 v1(78,418) ; C4.1@70.57,839 v1(106,839) ; R1.1 v1(127,328) ; v1(108.27,177) J1.A12 ; v1(235,841.87) R11.2 ; v1(291,612.6) IC1.2 ; R7.1@340,805.59 v1(340,841)
  other v1: -680,110 -620,110 -560,110 -498,112 -307,198 -579,232 -579,286 -459.37,287 -301,298 -579,339 12.8,692 -56.61,931.1
NetC5_1: C5.1 D2.1 IC1.3 J2.2
NetC7_1: C7.1 D3.1 IC2.3 J3.2
NetD4_2: D4.2 R10.1 | length 69.9
  Top Layer w10: R10.1 D4.2
NetD5_1: D5.1 U2.11 | length 276
  Top Layer w10: v1(115,693) 115.08,693.08 115.08,741.46 U2.11 ; v1(168,836) D5.1
  Bottom Layer w10: v1(115,693) 161,693 168,700 v1(168,836)
NetD5_2: D5.2 R11.1 | length 68.6
  Top Layer w10: D5.2 171.94,926.59 R11.1
NetIC1_1: IC1.1 R4.2 R7.2
NetIC2_1: IC2.1 R8.2 R9.2
NetJ1_A5: J1.A5 R2.2 | length 118.1
  Top Layer w15: R2.2 -39.41,326.03 -19.68,306.31 J1.A5
NetJ1_B5: J1.B5 R1.2 | length 118.1
  Top Layer w15: J1.B5 19.68,306.31 39.41,326.03 R1.2
nRST: J4.4 R3.1 U2.4 | length 711.4
  Top Layer w10: U2.4 -38.39,580.61 -27.5,591.5 183.91,591.5 R3.1 268.41,592.59 400.26,460.74 J4.4@400.26,315
SCL: R6.1 U2.17 U3.2 | length 267.6
  Top Layer w10: U3.2 -107.8,924.8 -61,878 -61,838.84 -60.86,838.7 -60.86,836.73 -38.39,814.26 U2.17
SDA: R5.1 U2.18 U3.1 | length 586.6
  Top Layer w10: U3.1 -133.39,925.61 -184,875 -184,636.59 -69.41,636.59 -63.98,642.02 U2.18
SWCLK: J4.3 U2.20 | length 948.4
  Top Layer w10: U2.20 -114.58,740.96 -114.58,664.58 v1(-114,664)
  Bottom Layer w10: v1(-114,664) -20,570 474.05,570 478,566.05 J4.3@478,328.28
SWDIO: J4.2 U2.19 | length 1025.6
  Top Layer w10: U2.19 -89.49,741.46 -89.49,692.26 v1(-89.41,692.18)
  Bottom Layer w10: v1(-89.41,692.18) -89.41,691.84 -63.57,666 502,666 556.74,611.26 J4.2
pads on no net: J1.1 J1.2 J1.3 J1.4 J2.M J3.M U2.2 U2.3 U2.6 U2.7 U2.8 U2.9 U2.10

## Polygon pours and split planes (outlines as drawn)
NetC5_1 on Top Layer "NETC5_1_L01_P017" (solid, pour order 17): 385,775 432.5,775 475,730 700,730 705,725 705,650 700,645 535,645 460,645 435,620 385,620 380,625 380,770
+VBUS on Top Layer "+VBUS_L01_P027" (solid, pour order 27): 710,810 710,800 710,750 700,740 480,740 460,760 440,780 385,780 380,785 380,835 385,840 700,840 710,830 710,800
GND on Top Layer "GND_L01_P002" (solid, pour order 2): -240,400 -340,400 -350,390 -350,330 -360,320 -490,320 -510,340 -510,380 -520,390 -710,390 -720,380 -720,84 -706,70 -447,70 -439,78 -439,134 -445,140 -470,140 -480,150 -480,240 -470,250 -370,250 -360,240 -360,191.6 -348.4,180 -240,180 -230,190 -230,390
+VBUS on Top Layer "Top Layer-+VBUS" (solid, pour order 29): -269,70 -214.86,15.86 95.1,15.86 110.1,30.86 110.1,143.9 74.9,179.1 74.9,242 45.1,242 45.1,185.86 40.1,180.86 -39.9,180.86 -44.9,185.86 -44.9,242 -74.9,242 -74.9,160.86 -84.76,151 -260,151 -279,170 -350,170 -370,190 -370,230 -380,240 -450,240 -460,230 -460,160 -450,150 -440,150 -430,140 -430,80 -420,70
+VBUS on Top Layer "+VBUS_L01_P003" (solid, pour order 3): -705,725 -465,725 -435,695 -385,695 -380,690 -380,635 -386,629 -533,629 -704,629 -710,635 -710,720
+3V3 on Top Layer "+3V3_L01_P014" (solid, pour order 14): -240,540 -230,530 -230,420.51 -242.71,407.8 -352.2,407.8 -360,400 -360,340 -370,330 -460,330 -470,340 -470,530 -460,540
NetIC1_1 on Top Layer "NETIC1_1_L01_P010" (solid, pour order 10): 365,770 365,665 360,660 305,660 300,665 300,720 290,730 250,730 245,735 245,770 250,775 360,775 250,775 360,775
NetIC2_1 on Top Layer "NETIC2_1_L01_P009" (solid, pour order 9): -365,710 -365,815 -360,820 -305,820 -300,815 -300,760 -290,750 -250,750 -245,745 -245,710 -250,705 -360,705 -250,705 -360,705
NetC7_1 on Top Layer "NETC7_1_L01_P004" (solid, pour order 4): -430,705 -465,740 -705,740 -710,745 -710,855 -705,860 -440,860 -430,870 -385,870 -380,865 -380,710 -385,705
+VBUS on Mid Layer 2 "+VBUS_L03_P024" (solid, pour order 24): -950,1350 950,1350 950,10 -950,10
+3V3 on Mid Layer 2 "+3V3_L03_P023" (solid, pour order 23): 800,250 800,400 750,450 300,450 250,500 250,600 200,650 125,650 75,700 75,1100 25,1150 -250,1150 -300,1100 -300,920 -230,850 -230,620 -300,550 -500,550 -540,510 -540,290 -500,250 -300,250 -250,300 202.43,300 302.43,200 750,200
GND on Mid Layer 1 "GND_L02_P015" (solid, pour order 15): -950,1350 -950,0 950,0 950,1350

## Other copper
Top Layer:
  region: 1781 vertices and 1 holes, not listed, extent 452.72,1063.96 550.14,1161.38
  region: 3055 vertices and 0 holes, not listed, extent 474.59,1122.08 639.55,1256.52
  region: 3045 vertices and 0 holes, not listed, extent 511.1,974.67 645.66,1140.14
  region: 3031 vertices and 0 holes, not listed, extent 357.58,1085.96 491.76,1250.41
  region: 3052 vertices and 0 holes, not listed, extent 363.56,968.31 529.54,1102.62

## Silkscreen, mask and mechanical layers (free items; w line width, h text height)
Top Overlay:
  text "CYCLONE" at -745,1080.78 h120
  text "ADDR / 0x18" at -11.98,1003.41 h42
  text "+" at 616.99,816 h42 r90
  text "+" at -578.01,627 h42 r90
  text "3V3" at -562,509.18 h80
  text "IO" at 579.06,399.61 h42 r90
  text "GND" at 343.99,394.02 h42 r90
  text "RST" at 425.99,394.02 h42 r90
  text "CLK" at 499.34,391.85 h42 r90
  text "3V3" at 656.82,391.85 h42 r90
  text "SWD" at 282.61,189.3 h80
Bottom Overlay:
  text "REV A 5/24 / GITHUB.COM/AKAREZ/CYCLONE" at 893,955 h42
Mechanical 13:
  lines w10: -950,102.43 ccw(c-847.57,102.43) -847.57,0 -415,0 847.57,0 ccw(c847.57,102.43) 950,102.43 950,195 950,1247.57 ccw(c847.57,1247.57) 847.57,1350 -847.57,1350 ccw(c-847.57,1247.57) -950,1247.57 -950,102.43